# EAGLE board Analog (EAGLE 9.4.1)
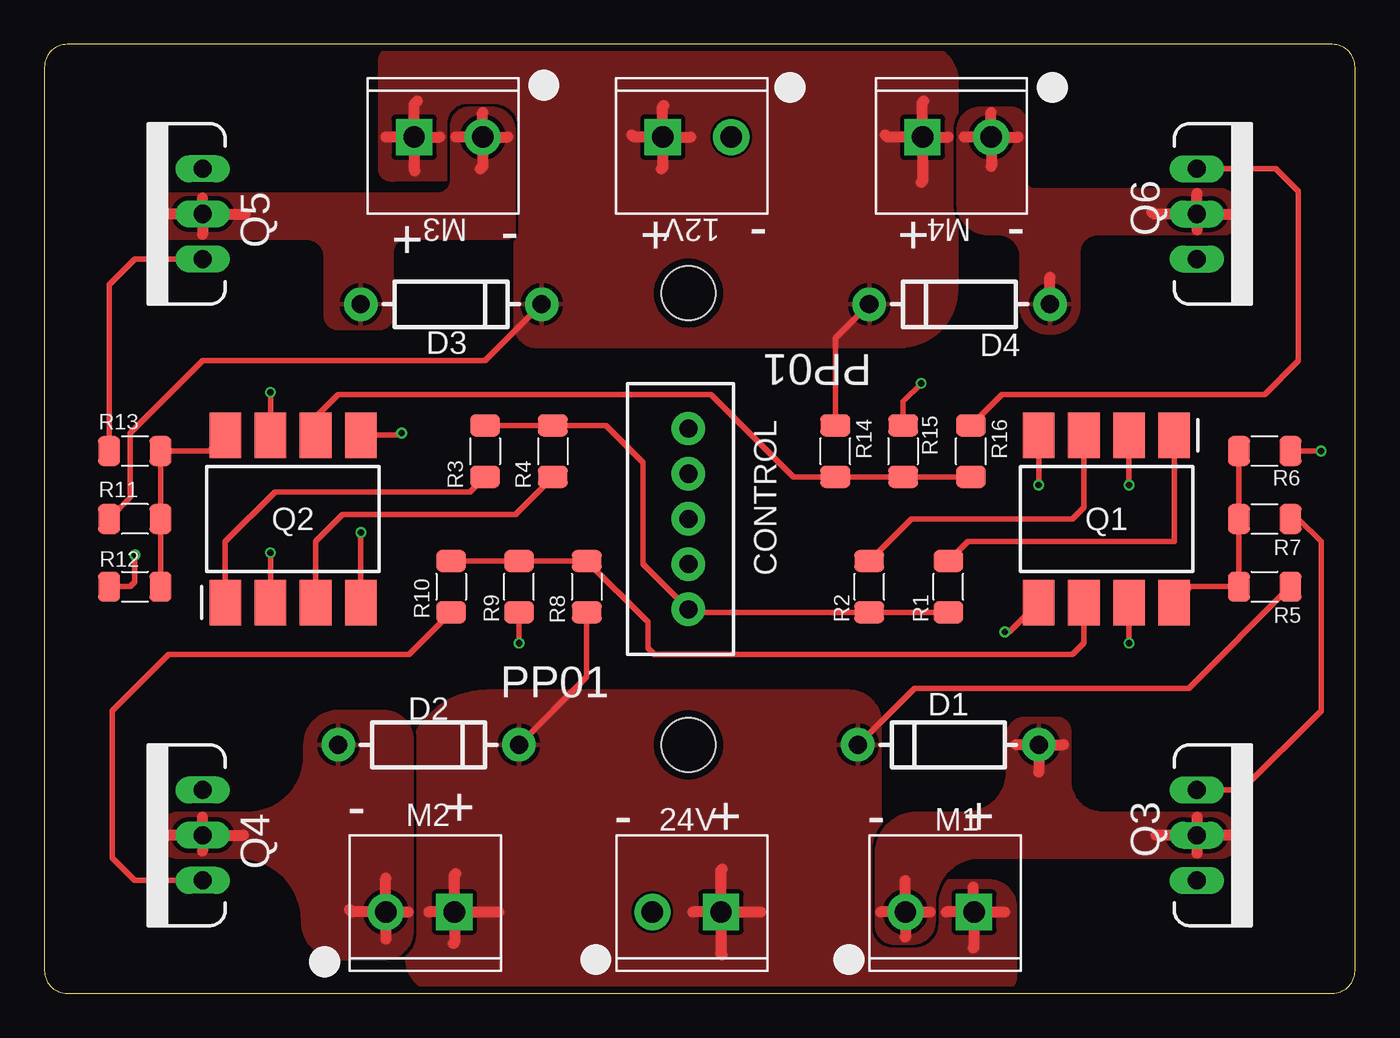
[diagram p0: board, top side]
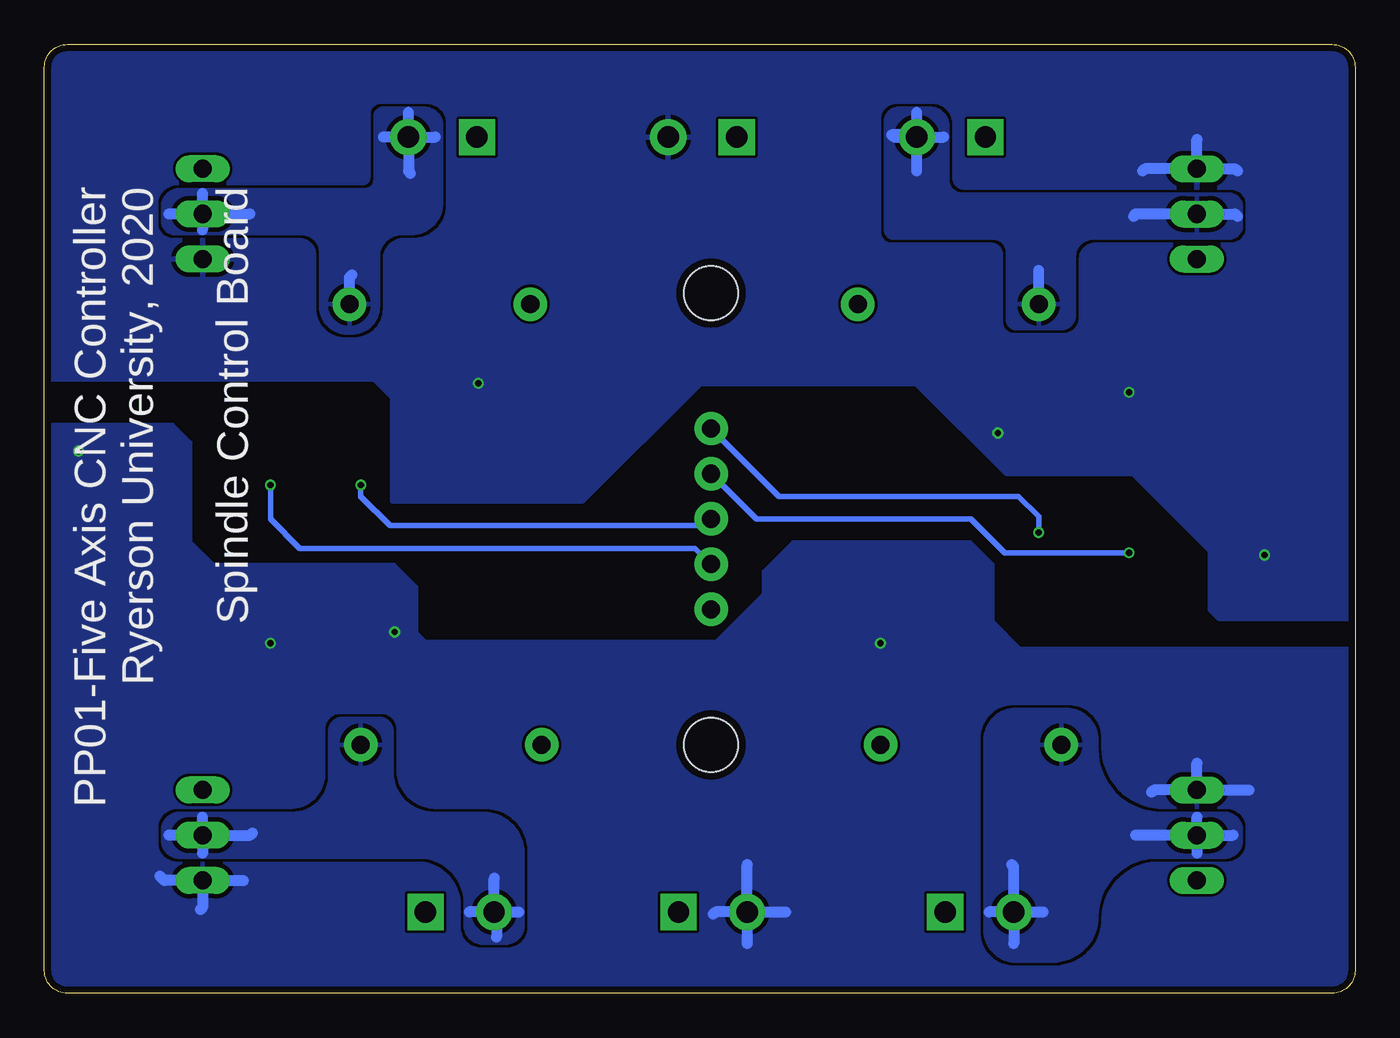
[diagram p1: board, bottom side, seen from below]

Size 73.66 x 53.34 mm. Coordinates in mm from the lower left corner, seen from the top.
Outline: 0,52.07 0,1.27 arc90 1.27,0 72.39,0 arc90 73.66,1.27 73.66,52.07 arc90 72.39,53.34 1.27,53.34 arc90 0,52.07
Copper layers (1*16): Top 0.035559375mm / dielectric 1.6mm / Bottom 0.035559375mm
Design rules "oshpark-2layer-tented": minimum track width 6mil, minimum drill 10mil, track to track 6mil, track to pad 6mil, pad to pad 6mil, via to via 6mil, smd to smd 6mil, copper to edge 15mil, drill to drill 6mil, minimum pad ring 5mil, minimum via ring 5mil, stop-mask expansion 2.5mil, vias tented up to drill 20mil, thermal gap 10mil

## Footprints (pad centres in the part's own frame; a part is rotated, then mirrored left to right if it is on the bottom)
SCREWTERMINAL-3.5MM-2_LOCK = drill 1.2 pad 2.032 square: 1 -0.178,0 | drill 1.2 pad 2.032: 2 3.678,0
JST-XH-5P = drill 1.016 pad 1.88: 1 0,0; 2 2.54,0; 3 5.08,0; 4 7.62,0; 5 10.16,0
DIODE-1N4001-KIT = drill 1.016 pad 1.88: A -5.08,0; C 5.08,0
PDIP8-GULLWING = smd 2.54 x 1.778: 1 -4.705,3.81; 2 -4.705,1.27; 3 -4.705,-1.27; 4 -4.705,-3.81; 5 4.705,-3.81; 6 4.705,-1.27; 7 4.705,1.27; 8 4.705,3.81
TO220V = drill 1.016 long: D 0,0; G -2.54,0; S 2.54,0
RES_1206 = smd 1.24 x 1.68: 1 -1.445,0; 2 1.445,0
STAND-OFF-TIGHT = hole 3.048: 0,0

## Placement (x,y rotation side)
12V  2P-SCREWTERMINAL-PLUGABLE  [SCREWTERMINAL-3.5MM-2_LOCK]  34.92,48.13 0 top
24V  2P-SCREWTERMINAL-PLUGABLE  [SCREWTERMINAL-3.5MM-2_LOCK]  37.85,4.57 180 top
CONTROL  JST-XH-5P  [JST-XH-5P]  36.2,21.59 90 top
D1  [DIODE-1N4001-KIT]  50.8,13.97 180 top
D2  [DIODE-1N4001-KIT]  21.59,13.97 0 top
D3  [DIODE-1N4001-KIT]  22.86,38.73 0 top
D4  [DIODE-1N4001-KIT]  51.44,38.73 180 top
M1  2P-SCREWTERMINAL-PLUGABLE  [SCREWTERMINAL-3.5MM-2_LOCK]  52.07,4.57 180 top
M2  2P-SCREWTERMINAL-PLUGABLE  [SCREWTERMINAL-3.5MM-2_LOCK]  22.86,4.57 180 top
M3  2P-SCREWTERMINAL-PLUGABLE  [SCREWTERMINAL-3.5MM-2_LOCK]  20.95,48.13 0 top
M4  2P-SCREWTERMINAL-PLUGABLE  [SCREWTERMINAL-3.5MM-2_LOCK]  49.53,48.13 0 top
Q1  [PDIP8-GULLWING]  59.69,26.67 270 top
Q2  [PDIP8-GULLWING]  13.97,26.67 90 top
Q3  [TO220V]  64.77,8.89 270 top
Q4  [TO220V]  8.89,8.89 90 top
Q5  [TO220V]  8.89,43.81 90 top
Q6  [TO220V]  64.77,43.81 270 top
R1  [RES_1206]  50.8,22.86 90 top
R2  [RES_1206]  46.35,22.86 90 top
R3  [RES_1206]  24.77,30.48 270 top
R4  [RES_1206]  28.57,30.48 270 top
R5  [RES_1206]  68.58,22.86 0 top
R6  [RES_1206]  68.58,30.48 180 top
R7  [RES_1206]  68.58,26.67 0 top
R8  [RES_1206]  30.48,22.86 270 top
R9  [RES_1206]  26.67,22.86 90 top
R10  [RES_1206]  22.86,22.86 270 top
R11  [RES_1206]  5.08,26.67 180 top
R12  [RES_1206]  5.08,22.86 0 top
R13  [RES_1206]  5.08,30.48 180 top
R14  [RES_1206]  44.45,30.48 90 top
R15  [RES_1206]  48.26,30.48 270 top
R16  [RES_1206]  52.07,30.48 90 top
U$1  STANDOFF  [STAND-OFF-TIGHT]  36.2,13.97 0 top
U$2  STANDOFF  [STAND-OFF-TIGHT]  36.2,39.37 0 top

## Library data of the parts
12V 24V CONTROL D1-D4 M1-M4 Q1-Q6 R1-R16 U$1 U$2 = Analog

## Nets
5V: CONTROL.1 R1.1 R2.1 R3.1 R4.1
12V: 12V.1 D3.C D4.C M3.1 M4.1 R11.2 R14.2
24V: 24V.1 D1.C D2.C M1.1 M2.1 R5.2 R8.2
AGND: 24V.2 Q1.5 Q1.7 Q3.S Q4.S R6.1 R9.1
CO1: Q1.8 R5.1 R6.2 R7.1
CO2: Q1.6 R8.1 R9.2 R10.1
CO3: Q2.8 R11.1 R12.2 R13.1
CO4: Q2.6 R14.1 R15.2 R16.1
GND: 12V.2 Q2.5 Q2.7 Q5.S Q6.S R12.1 R15.1
N$1: CONTROL.2 Q1.2
N$2: Q1.1 R1.2
N$3: Q1.3 R2.2
N$4: CONTROL.3 Q1.4
N$5: D1.A M1.2 Q3.D
N$6: Q3.G R7.2
N$7: Q2.1 R3.2
N$8: CONTROL.4 Q2.2
N$9: CONTROL.5 Q2.4
N$10: D2.A M2.2 Q4.D
N$11: Q2.3 R4.2
N$12: D3.A M3.2 Q5.D
N$13: Q4.G R10.2
N$14: Q5.G R13.2
N$16: D4.A M4.2 Q6.D
N$17: Q6.G R16.2

## Tracks (layer width: path | path; a pad name or v marks a point on that pad's centre or on a via)
5V
  Top 0.305: R1.1 R2.1 36.37,21.41 CONTROL.1 33.66,24.13 33.66,29.84 31.57,31.93 R4.1 R3.1
12V
  Top 0.305: R14.2 44.45,36.83 D4.C | R11.2 4.83,27.86 4.83,31.5 8.89,35.56 24.77,35.56 D3.C
  Top 0.61: M3.1 20.78,49.99 20.95,50.16 | M3.1 20.78,46.28 20.83,46.23 | M3.1 19.18,48.13 | M3.1 22.23,48.13 | 12V.1 34.75,46.43 34.67,46.35 | 12V.1 33.15,48.13 33.02,48.26 | 12V.1 36.32,48.13 | 12V.1 34.75,49.86 34.8,49.91 | M4.1 47.37,48.13 47.24,48.26 | M4.1 49.35,45.67 49.28,45.59 | M4.1 49.35,50.11 49.4,50.16 | M4.1 50.8,48.13
  pour Top (rank 2): 18.8,46.23 18.8,52.32 arc-90 19.81,53.34 49.28,53.34 arc-90 51.31,51.31 51.31,39.62 arc-90 48.01,36.32 27.69,36.32 arc-90 26.42,37.59 26.42,45.97 arc-90 26.16,45.72 19.81,45.72 arc-90
24V
  Top 0.305: R8.2 30.48,17.78 D2.C | R5.2 64.31,17.14 48.9,17.14 D1.C
  Top 0.61: M1.1 52.25,2.59 52.2,2.54 | M1.1 50.67,4.57 | M1.1 53.98,4.57 | M1.1 52.2,4.62 52.2,5.97 | 24V.1 38.02,6.91 38.1,6.99 | 24V.1 40.26,4.57 | 24V.1 38.02,2.23 38.1,2.16 | 24V.1 36.45,4.57 | M2.1 23.04,6.66 23.11,6.73 | M2.1 25.53,4.57 | M2.1 23.04,2.85 22.99,2.79 | M2.1 21.59,4.57
  pour Top (rank 2): 22.35,0 arc-90 20.32,2.03 20.32,12.45 arc-90 24.89,17.02 45.21,17.02 arc-90 46.99,15.24 46.99,8.13 arc90 48.77,6.35 53.09,6.35 arc-90 54.61,4.83 54.61,1.02 arc-90 53.59,0
AGND  (via drill 0.35)
  Top 0.305: R6.1 v71.75,30.48 | Q1.7 v60.96,19.68 | Q1.5 54.23,20.32 v53.98,20.32 | R9.1 v26.67,19.68
  Bottom 0.61: Q4.S 5.97,11.43 | Q4.S 11.3,11.43 11.43,11.3 | Q4.S 8.89,12.95 | 24V.2 34.17,7.23 34.16,7.24 | 24V.2 32,4.57 | 24V.2 34.17,2.8 34.16,2.79 | 24V.2 35.94,4.57 36.07,4.45 | Q3.S 66.93,6.35 67.18,6.6 | Q3.S 62.48,6.35 | Q3.S 64.77,4.83 64.9,4.7
  pour Bottom (rank 2): 73.66,32 66.42,32 65.41,30.99 65.41,25.4 64.14,24.13 53.98,24.13 52.7,22.86 52.7,20.32 52.2,19.81 35.94,19.81 33.27,22.48 33.27,23.75 31.62,25.4 21.59,25.4 20.32,24.13 20.32,20.95 18.8,19.43 0.13,19.43 0.13,0.64 0.64,0.13 73.03,0.13 73.66,0.76
CO1
  Top 0.305: R6.2 R7.1 R5.1 64.39,22.86 Q1.8
CO2
  Top 0.305: R10.1 R9.2 27.13,24.3 R8.1 33.91,20.88 33.91,19.43 34.29,19.05 57.78,19.05 58.42,19.68 Q1.6
CO3
  Top 0.305: R12.2 R11.1 R13.1 9.27,30.48 Q2.8
CO4
  Top 0.305: R16.1 R15.2 R14.1 42.09,29.04 37.47,33.66 16.51,33.66 15.24,32.38 Q2.6
GND  (via drill 0.35)
  Top 0.305: Q2.5 19.95,31.38 v20.07,31.5 | Q2.7 v12.7,33.78 | R12.1 4.83,22.86 5.08,23.11 v5.08,24.64 | R15.1 48.26,33.27 v49.28,34.29
  Bottom 0.61: Q5.S 11.81,46.35 11.94,46.23 | Q5.S 8.89,48.01 | Q5.S 6.73,46.35 6.6,46.23
  pour Bottom (rank 2): 0,21.08 7.62,21.08 8.13,21.59 8.13,24.89 12.45,29.21 19.56,29.21 24.64,34.29 36.83,34.29 43.43,27.69 54.1,27.69 54.1,33.53 55.12,34.54 73.66,34.54 73.66,52.58 72.9,53.34 0.76,53.34 0,52.58
N$1  (via drill 0.35)
  Top 0.305: v60.96,28.57 Q1.2
  Bottom 0.305: CONTROL.2 37.08,25.02 59.31,25.02 60.96,26.67 v60.96,28.57
N$2
  Top 0.305: R1.2 51.9,25.4 63.5,25.4 Q1.1
N$3
  Top 0.305: R2.2 48.72,26.67 57.78,26.67 58.42,27.3 Q1.3
N$4  (via drill 0.35)
  Top 0.305: v55.88,28.57 Q1.4
  Bottom 0.305: v55.88,28.57 55.88,27.94 54.23,26.29 36.58,26.29 CONTROL.3
N$5
  Top 0.61: 66.67,8.89 Q3.D | 64.77,9.91 Q3.D | Q3.D 62.48,8.89 | Q3.D 64.77,7.87 | D1.A 55.88,12.45 | D1.A 57.28,13.97 | D1.A 54.61,13.97 | M1.2 48.39,6.35 | M1.2 46.99,4.57 | M1.2 49.78,4.57 | M1.2 48.39,3.18 48.39,3.17
  Bottom 0.61: M1.2 48.39,6.48 | M1.2 46.99,4.57 | M1.2 49.78,4.57 | M1.2 48.26,4.44 48.26,3.17 | Q3.D 62.1,8.89 61.98,9.02 | Q3.D 66.67,8.89 | Q3.D 64.77,7.87 | Q3.D 64.77,9.91
  pour Top: 50.04,5.08 50.04,4.06 arc-90 48.77,2.79 47.75,2.79 arc-90 46.74,3.81 46.74,7.87 arc-90 49.02,10.16 51.82,10.16 arc90 54.1,12.45 54.1,14.48 arc-90 55.12,15.49 56.9,15.49 arc-90 57.66,14.73 57.66,11.94 arc90 59.44,10.16 65.79,10.16 arc-90 67.06,8.89 67.06,8.64 arc-90 66.04,7.62 52.58,7.62 arc90
  pour Bottom: 50.8,10.16 49.02,10.16 arc90 46.74,7.87 46.74,3.81 arc90 47.75,2.79 49.02,2.79 arc90 50.04,3.81 50.04,5.08 arc-90 52.58,7.62 62.48,7.62 66.04,7.62 arc90 67.06,8.64 67.06,9.14 arc90 66.04,10.16 59.69,10.16 arc-90 57.66,12.19 57.66,14.73 arc90 56.9,15.49 54.86,15.49 arc90 54.1,14.73 54.1,12.45 arc-90 51.82,10.16
N$6
  Top 0.305: Q3.G 67.31,11.43 71.75,15.88 71.75,25.4 70.48,26.67 R7.2
N$7
  Top 0.305: R3.2 23.92,28.19 12.95,28.19 10.16,25.4 Q2.1
N$8  (via drill 0.35)
  Top 0.305: v12.7,24.77 Q2.2
  Bottom 0.305: CONTROL.4 33.66,26.67 21.59,26.67 19.68,24.77 v12.7,24.77
N$9  (via drill 0.35)
  Top 0.305: v17.78,25.91 Q2.4
  Bottom 0.305: CONTROL.5 32.38,27.94 18.92,27.94 17.78,26.8 v17.78,25.91
N$10
  Top 0.61: M2.2 19.18,6.48 | M2.2 17.27,4.57 17.14,4.7 | M2.2 19.18,3.05 | M2.2 20.45,4.57 | Q4.D 11.18,8.89 | Q4.D 6.86,8.89 6.73,9.02 | Q4.D 8.89,9.91 | Q4.D 8.89,8
  Bottom 0.61: M2.2 19.18,7.12 19.3,7.24 | M2.2 17.53,4.57 | M2.2 20.57,4.57 | M2.2 19.18,2.79 | Q4.D 12.32,8.89 | Q4.D 6.86,8.89 | Q4.D 8.89,9.91 | Q4.D 8.89,7.87
  pour Top: 6.35,8.89 6.35,8.76 arc90 7.49,7.62 10.92,7.62 arc-90 14.48,4.06 arc90 16.64,1.91 19.05,1.91 arc90 20.7,3.56 20.7,14.22 arc90 19.05,15.88 16.51,15.88 arc90 14.61,13.97 14.61,13.34 arc-90 11.43,10.16 7.62,10.16 arc90
  pour Bottom: 10.92,10.16 7.37,10.16 arc90 6.35,9.14 6.35,8.64 arc90 7.37,7.62 11.18,7.62 arc-90 14.48,4.32 arc90 17.02,1.78 19.05,1.78 arc90 20.83,3.56 20.83,14.22 arc90 19.05,16 16.26,16 arc90 14.48,14.22 14.48,13.72 arc-90
N$11
  Top 0.305: R4.2 26.46,26.92 16.76,26.92 15.24,25.4 Q2.3
N$12
  Top 0.61: M3.2 24.63,49.52 24.64,49.53 | M3.2 24.63,46.48 24.51,46.35 | M3.2 23.11,48.13 | M3.2 26.04,48.13 | Q5.D 11.3,43.81 | Q5.D 6.6,43.81 | Q5.D 8.89,42.67 | Q5.D 8.89,44.7
  Bottom 0.61: 12.45,43.69 12.32,43.81 Q5.D 6.73,43.81 6.6,43.69 | D3.A 17.78,40.64 | M3.2 24.64,46.23 | M3.2 24.63,49.52 24.64,49.53 | M3.2 24.76,48.26 26.04,48.26 25.91,48.13 M3.2 | M3.2 23.11,48.13
  pour Top: 6.86,44.96 22.1,44.96 arc90 22.86,45.72 22.86,48.77 arc-90 23.88,49.78 25.15,49.78 arc-90 26.42,48.51 26.42,42.93 arc-90 25.91,42.42 20.32,42.42 arc90 19.56,41.66 19.56,38.1 arc-90 18.8,37.34 16.51,37.34 arc-90 15.75,38.1 15.75,41.4 arc90 14.73,42.42 7.11,42.42 arc-90 6.35,43.18 6.35,44.45 arc-90
  pour Bottom: 13.72,44.96 7.37,44.96 7.11,44.96 arc90 6.35,44.2 6.35,43.69 6.35,43.18 arc90 7.11,42.42 8.38,42.42 14.73,42.42 arc-90 15.75,41.4 15.75,38.1 arc90 16.51,37.34 17.53,37.34 19.05,37.34 arc90 19.56,37.85 19.56,39.12 19.56,41.66 arc-90 20.32,42.42 20.57,42.42 25.91,42.42 arc90 26.42,42.93 26.42,45.97 26.42,49.02 arc90 25.65,49.78 24.64,49.78 23.88,49.78 arc90 22.86,48.77 22.86,47.5 22.86,45.72 arc-90 22.1,44.96 20.83,44.96
N$13
  Top 0.305: R10.2 20.5,19.05 6.99,19.05 3.81,15.88 3.81,7.62 5.08,6.35 Q4.G
N$14
  Top 0.305: Q5.G 5.08,41.27 3.63,39.83 R13.2
N$16
  Top 0.61: Q6.D 62.36,43.81 62.23,43.94 | Q6.D 66.8,43.81 | Q6.D 64.77,44.96 | Q6.D 64.77,42.93 | M4.2 54.74,48.13 | M4.2 53.21,49.52 53.21,49.53 | M4.2 51.69,48.13 | M4.2 53.21,46.48 | D4.A 56.52,40.26
  Bottom 0.61: Q6.D 64.77,44.96 | Q6.D 62.1,43.81 | Q6.D 66.67,43.81 | Q6.D 64.77,42.93 | M4.2 53.21,46.22 53.09,46.1 | M4.2 51.69,48.13 | M4.2 53.21,49.52 53.21,49.53 | M4.2 54.61,48.13 | D4.A 56.52,40.26 56.39,40.39
  pour Top: 55.63,45.21 66.04,45.21 arc-90 67.06,44.2 67.06,43.43 arc-90 66.29,42.67 59.18,42.67 arc90 58.17,41.66 58.17,38.61 arc-90 56.64,37.08 56.39,37.08 arc-90 54.86,38.61 54.86,41.4 arc90 53.59,42.67 53.09,42.67 arc-90 51.31,44.45 51.31,48.51 arc-90 52.58,49.78 54.36,49.78 arc-90 55.12,49.02 55.12,45.72 arc90
  pour Bottom: 58.42,45.21 66.04,45.21 arc-90 67.06,44.2 67.06,43.43 arc-90 66.29,42.67 66.04,42.67 59.18,42.67 arc90 58.17,41.66 58.17,38.61 arc-90 56.64,37.08 56.39,37.08 arc-90 54.86,38.61 54.86,39.12 54.86,41.15 54.86,41.4 arc90 53.59,42.67 53.09,42.67 arc-90 51.31,44.45 51.31,44.7 51.31,48.26 51.31,48.77 arc-90 52.32,49.78 54.61,49.78 arc-90 55.12,49.28 55.12,47.5 55.12,45.72 arc90 55.63,45.21
N$17
  Top 0.305: R16.2 53.8,33.66 68.58,33.66 70.48,35.56 70.48,45.09 69.22,46.35 Q6.G

## Text on the board
tPlace: - + | - + | - + | PP01 | PP01 | - + | - + | - +
bPlace: PP01-Five Axis CNC Controller / Ryerson University, 2020 / / Spindle Control Board